# Altium PCB WRTnode2P_DB.PcbDoc (part 2 of 2)
Units mm, origin at the board's own origin, x right, y up, seen from the top; angles counter-clockwise.
Board outline 65.41 x 52.58 mm, 2 copper layers (Top Layer, Bottom Layer); 91 components, 81 nets, 456 pads, 154 vias.
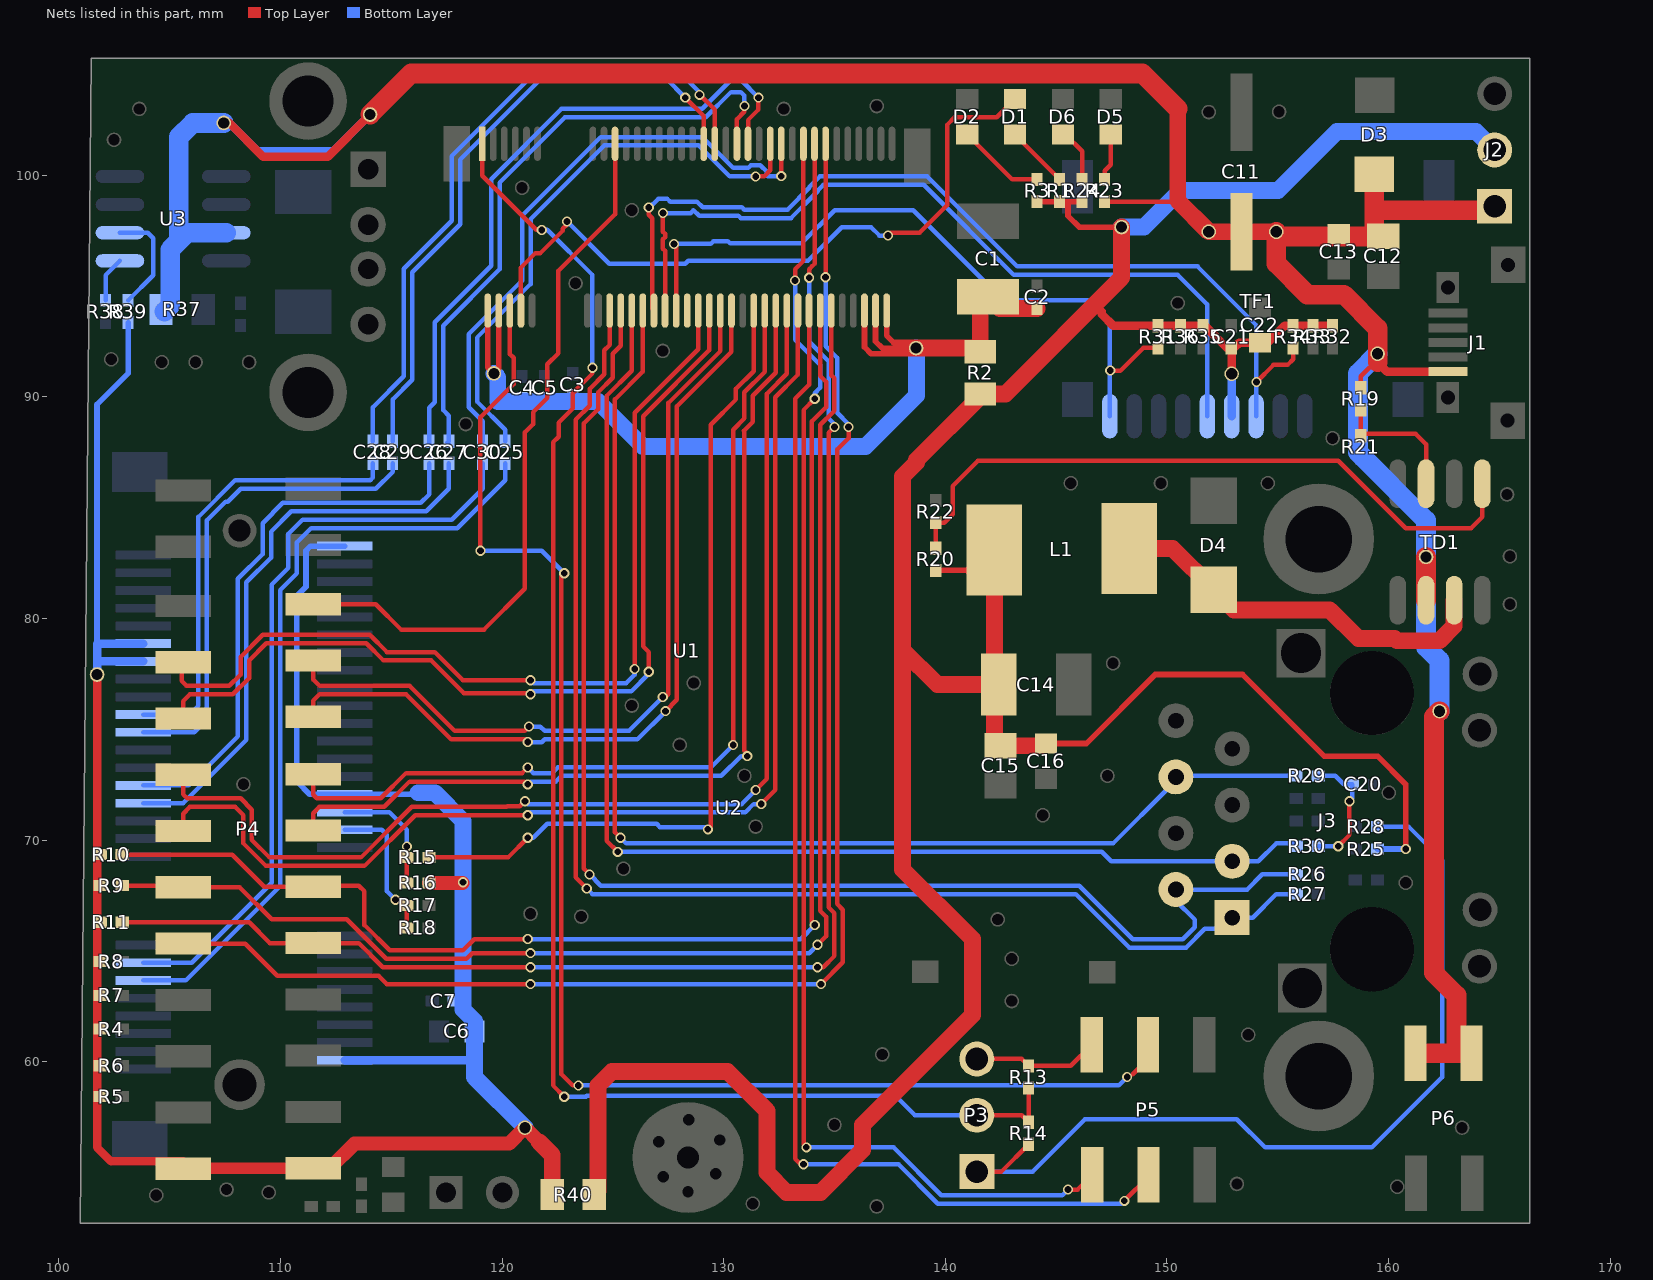
[diagram p2: the nets of this part, all layers, seen from the top]

## Via types
v1: diameter 0.457, hole 0.305, Top Layer to Bottom Layer, tented both sides, 151 vias
v2: diameter 1, hole 1, Top Layer to Bottom Layer, 2 vias
v3: diameter 0.457, hole 0.305, Top Layer to Bottom Layer, 1 vias

## Nets (pads, with @x,y where several pads share a name; then routed paths per layer and width w, separated by ;. In a path a pad name is that pad's centre, name@x,y a point inside that pad or via, vN(x,y) a via of type N, cw(c..) or ccw(c..) an arc to the next point about the centre after c; other vN are vias at no path point) (continued)
NetC20_2: C20.2 R29.1 R30.1 | length 5.7
  Top Layer w0.203: v1(157.734,69.723) 158.242,70.231 v1(158.242,71.755)
  Bottom Layer w0.203: R29.1@156.829,72.898 157.607,72.898 157.988,72.517 C20.2@158.369,72.517 158.369,71.882 v1(158.242,71.755) ; R30.1@156.837,69.723 v1(157.734,69.723)
NetC25_1: C25.1 U2.11 | length 35.1
  Bottom Layer w0.203: U2.11@103.806,63.665 105.732,63.665 109.982,67.914 109.982,81.28 110.744,82.042 110.744,83.439 111.379,84.074 117.983,84.074 120.142,86.233 C25.1@120.142,86.995
NetC26_1: C26.1 U2.25 | length 24.7
  Bottom Layer w0.203: U2.25@103.806,72.465 105.866,72.465 108.077,74.676 108.077,81.788 109.198,82.909 109.198,84.306 110.109,85.217 116.332,85.217 116.713,85.598 C26.1@116.713,87.003
NetC27_1: C27.1 U2.23 | length 25.7
  Bottom Layer w0.203: U2.23@103.806,71.665 105.604,71.665 108.458,74.518 108.458,81.63 109.579,82.751 109.579,83.925 110.49,84.836 116.586,84.836 117.602,85.852 C27.1@117.602,87.003
NetC28_1: C28.1 U2.33 | length 20.4
  Bottom Layer w0.203: U2.33@103.806,75.665 105.891,75.665 106.299,76.073 106.299,84.582 107.95,86.233 114.046,86.233 114.173,86.36 C28.1@114.173,87.003
NetC29_1: C29.1 U2.31 | length 21.8
  Bottom Layer w0.203: U2.31@103.806,74.865 106.107,74.865 106.68,75.438 106.68,84.424 107.521,85.265 107.617,85.265 108.204,85.852 114.3,85.852 115.062,86.614 C29.1@115.062,87.003
NetC30_1: C30.1 U2.13 | length 34.1
  Bottom Layer w0.203: U2.13@103.806,64.465 105.994,64.465 109.601,68.072 109.601,81.534 110.363,82.296 110.363,83.82 110.998,84.455 117.729,84.455 119.126,85.852 C30.1@119.126,86.995
NetD1_1: D1.1 R1.2 | length 2.9
  Top Layer w0.203: D1.1@143.154,101.841 143.154,101.821 R1.2@145.161,99.814
NetD2_1: D2.1 R3.2 | length 4
  Top Layer w0.203: D2.1@140.995,101.841 143.023,99.814 R3.2@144.145,99.814
NetD4_2: D4.2 L1.1 TD1.3 | length 17.8
  Top Layer w0.762: L1.1@148.311,83.16 150.264,83.16 D4.2@152.121,81.303 153.033,80.391 157.353,80.391 158.653,79.091 160.276,79.091 160.373,78.994 162.306,78.994 162.966,79.654 TD1.3@162.966,80.823
NetD5_1: D5.1 R23.2 | length 2.1
  Top Layer w0.203: R23.2@147.193,99.814 147.193,100.203 147.472,100.482 D5.1@147.472,101.841
NetD6_1: D6.1 R24.2 | length 2.5
  Top Layer w0.203: D6.1@145.313,101.841 145.428,101.841 146.177,101.092 R24.2@146.177,99.814
NetP3_2: P3.2 R13.2 R14.1 U1.1 | length 69.3
  Top Layer w0.203: U1.1@119.101,101.422 119.101,99.974 121.539,97.536 v1(121.793,97.536) ; v1(122.809,58.42) 122.301,58.928 122.301,87.949 122.555,88.203 122.555,88.842 123.19,89.477 123.19,90.17 124.079,91.059 v1(124.079,91.313) ; P3.2@141.427,57.582 143.451,57.582 R14.1@143.764,57.269 R13.2@143.764,58.809
  Bottom Layer w0.203: v1(121.793,97.536) 122.047,97.536 124.079,95.504 v1(124.079,91.313) ; v1(122.809,58.42) 123.789,58.42 123.825,58.456 137.759,58.456 138.633,57.582 P3.2@141.427,57.582
NetR15_2: R15.2 R16.2 U2.22 | length 5.5
  Top Layer w0.203: R16.2@115.705,68.072 R15.2@115.705,69.215 v1(115.705,69.715)
  Bottom Layer w0.203: U2.22@112.906,71.265 114.917,71.265 115.705,70.477 v1(115.705,69.715)
NetR17_2: R17.2 R18.1 U2.20 | length 6.7
  Top Layer w0.203: v1(115.189,67.31) 115.451,67.31 R17.2@115.705,67.056 R18.1@115.705,66.04
  Bottom Layer w0.203: U2.20@112.906,70.465 114.574,70.465 114.808,70.231 114.808,67.691 v1(115.189,67.31)
NetR19_1: R19.1 R21.1 TD1.7 | length 6.1
  Top Layer w0.203: R21.1@158.75,88.249 158.75,88.829 R19.1@158.75,89.408 ; R21.1@158.75,88.329 161.226,88.329 161.696,87.859 TD1.7@161.696,86.081
NetR20_2: R20.2 R22.2 TD1.5 | length 30.3
  Top Layer w0.203: R20.2@139.573,83.169 R22.2@139.573,84.328 139.954,84.328 140.335,84.709 140.335,85.979 141.478,87.122 157.734,87.122 160.782,84.074 163.728,84.074 164.236,84.582 TD1.5@164.236,85.7
PCIE_CKN: C25.2 U1.53 | length 25.6
  Top Layer w0.203: v1(131.445,99.949) 131.826,99.949 132.101,100.224 U1.53@132.101,101.422
  Bottom Layer w0.203: C25.2@120.142,87.995 120.142,88.519 118.872,89.789 118.872,92.679 121.285,95.092 121.285,98.013 124.618,101.346 128.874,101.346 130.271,99.949 v1(131.445,99.949)
PCIE_CKP: C30.2 U1.55 | length 27
  Top Layer w0.203: v1(132.601,99.962) U1.55@132.601,101.422
  Bottom Layer w0.203: C30.2@119.126,87.995 119.126,88.9 118.491,89.535 118.491,92.837 120.904,95.25 120.904,98.171 124.46,101.727 129.032,101.727 130.429,100.33 131.108,100.33 131.235,100.457 131.655,100.457 131.953,100.159 131.953,99.98 131.984,99.949 131.996,99.962 v1(132.601,99.962)
PCIE_RXN: C27.2 U1.47 | length 28
  Top Layer w0.203: U1.47@130.601,101.422 130.601,102.534 130.937,102.87 v1(130.937,103.124)
  Bottom Layer w0.203: C27.2@117.538,87.94 C27.2@117.602,87.876 ; C27.2@117.602,88.003 117.602,89.154 117.348,89.408 117.348,93.218 119.888,95.758 119.888,99.664 122.84,102.616 129.19,102.616 130.333,103.759 130.779,103.759 130.937,103.601 v1(130.937,103.124)
PCIE_RXP: C26.2 U1.49 | length 29.6
  Top Layer w0.203: U1.49@131.101,101.422 131.101,102.495 131.572,102.966 v1(131.572,103.505)
  Bottom Layer w0.203: C26.2@116.713,87.876 C26.2@116.713,88.003 116.713,89.504 116.967,89.758 116.967,93.376 119.507,95.916 119.507,99.822 122.682,102.997 129.032,102.997 130.302,104.267 130.81,104.267 v1(131.572,103.505)
PCIE_TXN: C29.2 U1.41 | length 28.5
  Top Layer w0.203: v1(128.27,103.505) 129.101,102.674 U1.41@129.101,101.422
  Bottom Layer w0.203: C29.2@115.062,88.003 115.062,89.885 115.951,90.774 115.951,95.631 118.11,97.79 118.11,100.711 121.793,104.394 127.381,104.394 v1(128.27,103.505)
PCIE_TXP: C28.2 U1.43 | length 30.2
  Top Layer w0.203: v1(128.905,103.632) 128.905,103.663 129.601,102.967 U1.43@129.601,101.422
  Bottom Layer w0.203: C28.2@114.173,88.003 114.173,88.55 114.173,89.535 115.57,90.932 115.57,95.789 117.729,97.948 117.729,100.869 121.635,104.775 127.889,104.775 128.905,103.759 v1(128.905,103.632)
PERSTN: R15.1 U1.50 | length 37.6
  Top Layer w0.203: R15.1@116.705,69.215 120.269,69.215 v1(121.158,70.104) ; v1(129.286,70.485) 129.413,70.612 129.413,88.742 130.556,89.885 130.556,90.364 131.355,91.163 U1.50@131.355,93.898
  Bottom Layer w0.203: v1(121.158,70.104) 121.412,70.104 122.047,70.739 126.975,70.739 127.127,70.587 129.184,70.587 v1(129.286,70.485)
REF_CLK0: P4.21 U1.25 | length 32.6
  Top Layer w0.203: P4.21@111.476,80.645 114.3,80.645 115.443,79.502 119.188,79.502 121.031,81.345 121.031,88.396 121.412,88.777 121.412,89.316 122.047,89.951 122.047,91.471 122.546,91.97 122.546,95.687 125.101,98.242 U1.25@125.101,101.422
RXIN0: J3.2 R26.1 U1.26 | length 62.2
  Top Layer w0.203: v1(123.952,68.453) 123.698,68.707 123.698,88.808 124.333,89.443 124.333,90.201 124.998,90.865 124.998,91.947 125.355,92.304 U1.26@125.355,93.898
  Bottom Layer w0.203: v1(123.952,68.453) 124.46,67.945 146.05,67.945 148.463,65.532 150.718,65.532 151.257,66.071 151.257,66.414 J3.2@150.409,67.262 ; J3.2@150.409,67.77 153.622,67.77 154.305,68.453 R26.1@155.837,68.453
RXIN1: P4.15 U1.52 | length 41.4
  Top Layer w0.203: P4.15@111.476,72.974 111.476,72.039 111.633,71.882 114.523,71.882 115.666,73.025 120.904,73.025 v1(121.158,73.279) ; v1(130.429,74.295) 130.429,88.519 130.937,89.027 130.937,90.206 131.855,91.124 U1.52@131.855,93.898
  Bottom Layer w0.203: v1(121.158,73.279) 121.412,73.025 122.27,73.025 122.524,73.279 129.413,73.279 v1(130.429,74.295)
RXIN2: P4.19 U1.44 | length 37
  Top Layer w0.203: P4.19@111.476,78.105 111.476,77.246 111.76,76.962 115.824,76.962 117.856,74.93 121.031,74.93 v1(121.221,75.12) ; v1(127.254,76.454) 127.381,76.454 127.508,76.581 127.508,89.727 129.855,92.074 U1.44@129.855,93.898
  Bottom Layer w0.203: v1(121.221,75.12) 121.73,75.12 121.92,74.93 125.73,74.93 v1(127.254,76.454)
RXIN4: R34.2 TF1.3 U1.32 | length 42.6
  Top Layer w0.203: v1(126.619,98.552) 126.619,98.223 126.784,98.058 126.784,93.968 U1.32@126.855,93.898 ; v1(154.051,90.678) 154.813,91.44 155.448,91.44 155.702,91.694 R34.2@155.702,92.21
  Bottom Layer w0.203: v1(126.619,98.552) 126.663,98.552 127.044,98.933 127.464,98.933 127.591,98.806 128.796,98.806 129.05,98.552 130.828,98.552 130.929,98.45 132.885,98.45 133.871,99.436 133.871,99.471 134.348,99.949 139.192,99.949 143.256,95.885 151.384,95.885 154.026,93.243 TF1.3@154.026,89.129
RXIP0: J3.1 R27.1 U1.24 | length 60.8
  Top Layer w0.203: v1(123.825,67.818) 123.317,68.326 123.317,88.965 123.952,89.6 123.952,90.359 124.617,91.023 124.617,92.105 124.855,92.343 U1.24@124.855,93.898
  Bottom Layer w0.203: v1(123.825,67.818) 124.079,67.564 145.892,67.564 148.305,65.151 150.876,65.151 151.717,65.992 J3.1@152.949,65.992 ; J3.1@152.949,66.5 153.876,66.5 154.94,67.564 R27.1@155.837,67.564
RXIP1: P4.13 U1.54 | length 42.3
  Top Layer w0.203: P4.13@111.476,70.434 111.476,71.217 111.76,71.501 114.681,71.501 115.824,72.644 121.031,72.644 v1(121.158,72.517) ; v1(131.064,73.787) 131.064,73.914 130.937,74.041 130.937,88.437 130.912,88.463 131.318,88.869 131.318,90.049 132.355,91.085 U1.54@132.355,93.898
  Bottom Layer w0.203: v1(121.158,72.517) 121.285,72.644 122.428,72.644 122.682,72.898 129.896,72.898 130.785,73.787 v1(131.064,73.787)
RXIP2: P4.17 U1.46 | length 37.7
  Top Layer w0.203: P4.17@111.476,75.514 111.476,76.297 111.76,76.581 115.666,76.581 117.698,74.549 121.031,74.549 v1(121.158,74.422) v1@121.285,74.422 ; v1(127.381,75.819) 127.889,76.327 127.889,89.57 130.355,92.035 U1.46@130.355,93.898
  Bottom Layer w0.203: v1(121.158,74.422) 121.793,74.422 121.92,74.549 126.111,74.549 v1(127.381,75.819)
RXIP4: TF1.5 U1.34 | length 37.2
  Top Layer w0.203: v1(127.262,98.298) 127.262,97.461 127.254,97.453 127.355,97.352 127.355,97.212 127.254,97.111 127.254,96.691 127.355,96.59 U1.34@127.355,93.898
  Bottom Layer w0.203: v1(127.262,98.298) 128.511,98.298 128.638,98.425 128.892,98.171 130.67,98.171 130.772,98.069 133.043,98.069 134.252,99.278 134.252,99.314 134.506,99.568 139.034,99.568 143.098,95.504 150.495,95.504 151.826,94.173 TF1.5@151.826,89.129
SPI_CLK: P4.10 U1.63 | length 68.6
  Top Layer w0.203: P4.10@105.613,65.329 108.407,65.329 109.855,63.881 114.427,63.881 114.808,63.5 v1(121.285,63.5) ; v1(134.397,63.5) 135.382,64.485 135.382,66.864 135.128,67.118 135.128,87.63 135.636,88.138 v1(135.636,88.646) ; v1(134.601,95.396) U1.63@134.601,101.422
  Bottom Layer w0.203: v1(121.285,63.5) v1(134.397,63.5) ; v1(134.601,95.396) 134.601,92.283 135.128,91.756 135.128,89.281 135.636,88.773 v1(135.636,88.646)
SPI_CS1: P4.12 R9.1 U1.64 | length 62.1
  Top Layer w0.203: R9.1@102.862,67.945 P4.12@105.537,67.945 ; P4.12@105.613,67.869 108.153,67.869 109.601,66.421 112.999,66.421 114.777,64.643 118.395,64.643 118.649,64.897 v1(121.285,64.897) ; v1(134.239,65.278) 134.62,65.659 134.62,66.548 134.366,66.802 134.366,88.742 135.001,89.377 135.001,90.836 134.855,90.982 U1.64@134.855,93.898
  Bottom Layer w0.203: v1(121.285,64.897) 133.858,64.897 v1(134.239,65.278)
SPI_MISO: P4.11 R10.1 U1.62 | length 62.5
  Top Layer w0.203: R10.1@102.862,69.342 107.823,69.342 109.271,67.894 P4.11@111.476,67.894 ; P4.11@111.527,67.945 113.538,67.945 113.792,67.691 113.792,66.167 114.935,65.024 118.237,65.024 118.745,65.532 v1(121.158,65.532) ; v1(134.112,66.167) 133.985,66.294 133.985,88.9 134.62,89.535 134.62,90.678 134.355,90.943 U1.62@134.355,93.898
  Bottom Layer w0.203: v1(121.158,65.532) 133.477,65.532 v1(134.112,66.167)
SPI_MOSI: P4.9 R11.1 U1.61 | length 70.6
  Top Layer w0.203: R11.1@102.862,66.294 108.585,66.294 109.525,65.354 P4.9@111.476,65.354 113.527,65.354 114.619,64.262 v1(121.285,64.262) ; v1(133.858,95.377) 133.858,95.758 133.985,95.885 134.101,96.001 U1.61@134.101,101.422 ; v1(134.239,64.262) 134.493,64.262 135.001,64.77 135.001,66.706 134.747,66.96 134.747,88.392 v1(135.001,88.646)
  Bottom Layer w0.203: v1(121.285,64.262) v1(134.239,64.262) ; v1(133.858,95.377) 133.858,92.487 134.747,91.598 134.747,89.027 135.001,88.773 v1(135.001,88.646)
TF_INT: R31.2 TF1.9 U1.36 | length 32.4
  Top Layer w0.203: v1(127.762,96.901) 127.82,96.901 127.855,96.867 U1.36@127.855,93.898 ; v1(147.447,91.186) 147.908,91.186 148.932,92.21 R31.2@149.606,92.21
  Bottom Layer w0.203: v1(127.762,96.901) 129.413,96.901 129.54,97.028 130.197,97.028 130.298,96.926 133.517,96.926 135.015,98.425 138.561,98.425 142.625,94.361 146.431,94.361 147.426,93.366 TF1.9@147.426,89.129
TXON0: J3.6 R29.2 U1.30 | length 56
  Top Layer w0.203: v1(125.349,70.104) 125.095,70.358 125.095,89.885 126.355,91.145 U1.30@126.355,93.898
  Bottom Layer w0.203: v1(125.349,70.104) 125.603,69.85 147.574,69.85 150.066,72.342 J3.6@150.409,72.342 ; J3.6@150.457,72.898 R29.2@155.829,72.898
TXON1: P4.16 U1.56 | length 52.3
  Top Layer w0.203: P4.16@105.613,72.949 105.613,72.06 105.791,71.882 108.204,71.882 108.712,71.374 108.712,70.008 109.505,69.215 113.634,69.215 115.92,71.501 120.204,71.501 120.225,71.522 120.798,71.522 v1(121.031,71.755) ; v1(131.445,72.263) 131.953,72.771 131.953,90.145 132.855,91.046 U1.56@132.855,93.898
  Bottom Layer w0.203: v1(121.031,71.755) 121.158,71.628 130.81,71.628 v1(131.445,72.263)
TXON2: P4.20 U1.40 | length 41.5
  Top Layer w0.203: P4.20@105.613,78.029 105.537,77.953 105.537,77.185 105.76,76.962 107.696,76.962 108.204,77.47 108.204,78.263 109.207,79.265 114.029,79.265 114.808,78.486 116.967,78.486 118.237,77.216 v1(121.285,77.216) ; v1(125.984,77.724) 125.984,89.281 128.855,92.152 U1.40@128.855,93.898
  Bottom Layer w0.203: v1(121.285,77.216) 121.412,77.089 125.603,77.089 125.984,77.47 v1(125.984,77.724)
TXOP0: J3.3 R30.2 U1.28 | length 56.2
  Top Layer w0.203: v1(125.222,69.469) 124.714,69.977 124.714,90.043 125.855,91.184 U1.28@125.855,93.898
  Bottom Layer w0.203: v1(125.222,69.469) 147.066,69.469 147.495,69.04 J3.3@152.949,69.04 154.13,69.04 154.94,69.85 R30.2@155.837,69.85
TXOP1: P4.14 U1.58 | length 53
  Top Layer w0.203: P4.14@105.613,70.409 105.613,71.196 105.918,71.501 107.95,71.501 108.331,71.12 108.331,69.85 109.347,68.834 113.792,68.834 116.078,71.12 v1(121.158,71.12) ; v1(131.699,71.628) 132.334,72.263 132.334,89.987 133.355,91.008 U1.58@133.355,93.898
  Bottom Layer w0.203: v1(121.158,71.12) 121.285,71.247 130.968,71.247 131.349,71.628 v1(131.699,71.628)
TXOP2: P4.18 U1.42 | length 42.2
  Top Layer w0.203: P4.18@105.613,75.489 105.613,76.276 105.918,76.581 107.854,76.581 108.585,77.312 108.585,78.105 109.364,78.884 113.871,78.884 114.65,78.105 116.809,78.105 118.282,76.632 v1@121.082,76.632 ; v1(126.619,77.597) 126.619,78.486 126.365,78.74 126.365,89.123 129.355,92.113 U1.42@129.355,93.898
  Bottom Layer w0.203: v1(121.285,76.581) 121.412,76.708 125.824,76.708 126.619,77.503 v1(126.619,77.597)
TXOP3: U1.38
UART0_RX: P5.1 U1.59 | length 60.5
  Top Layer w0.203: v1(133.223,95.25) 133.223,95.758 133.601,96.136 U1.59@133.601,101.422 ; v1(133.731,56.134) 133.604,56.261 133.604,89.408 v1(134.112,89.916) ; v1(145.542,54.229) 145.969,54.229 P5.1@146.634,54.894
  Bottom Layer w0.203: v1(133.223,95.25) 133.223,92.583 134.366,91.44 134.366,90.424 134.112,90.17 v1(134.112,89.916) ; v1(133.731,56.134) 137.668,56.134 139.827,53.975 145.288,53.975 v1(145.542,54.229)
UART0_TX: P5.3 U1.60 | length 55.9
  Top Layer w0.203: v1(133.604,55.372) 133.477,55.372 133.223,55.626 133.223,89.916 133.855,90.548 U1.60@133.855,93.898 ; v1(148.082,53.721) 149.174,54.813 P5.3@149.174,54.894
  Bottom Layer w0.203: v1(133.604,55.372) 137.891,55.372 139.669,53.594 147.955,53.594 v1(148.082,53.721)
UART1_RX: P3.3 P5.2 R13.1 | length 5.7
  Top Layer w0.203: P3.3@141.427,60.122 143.451,60.122 143.756,59.817 145.669,59.817 P5.2@146.609,60.757
UART1_TX: P5.4 U1.6 | length 65.9
  Top Layer w0.203: v1(119.024,83.058) 119.024,89.083 120.523,90.582 120.523,91.765 120.355,91.934 U1.6@120.355,93.898 ; v1(122.809,82.042) 122.682,81.915 122.682,59.436 123.19,58.928 v1(123.444,58.928) ; 148.463,59.436 149.149,60.122 P5.4@149.149,60.757
  Bottom Layer w0.203: v1(119.024,83.058) 121.793,83.058 v1(122.809,82.042) ; v1(123.444,58.928) 147.828,58.928 v1(148.209,59.309)
USB_OVERCUR: R39.1 U3.2 | length 4.9
  Bottom Layer w0.203: U3.2@102.756,97.409 104.013,97.409 104.267,97.155 104.267,95.496 R39.1@103.124,94.353
USB_PWREN: R38.1 U3.1 | length 2.1
  Bottom Layer w0.203: R38.1@102.108,94.353 102.108,95.491 U3.1@102.756,96.139
V3.3: C6.2 C7.2 P4.1 P4.2 pad.5@121.031,57.023 pad.7 R4.2 R5.2 R6.2 R7.2 R8.2 R9.2 R10.2 R11.2 R16.1 R39.2 R40.1 U2.2 U2.24 U2.39 U2.41 U2.52 | length 109.6
  Top Layer w0.381: pad.7@101.725,77.472 101.725,56.136 102.362,55.499 P4.2@105.613,55.499
  Top Layer w0.508: P4.2@105.613,55.169 105.639,55.194 P4.1@111.476,55.194 P4.1@112.243,55.194
  Top Layer w0.635: P4.1@112.243,55.194 113.347,56.299 120.307,56.299 pad.5@121.031,57.023 121.666,56.388 ; R16.1@116.705,68.072 v3@118.212,68.072
  Top Layer w0.762: 121.666,56.388 122.265,55.789 R40.1@122.265,54
  Bottom Layer w0.254: 101.725,78.865 101.725,89.66 103.124,91.059 R39.2@103.124,93.353 ; U2.52@112.906,83.265 111.357,83.265 111.15,83.058 111.15,81.432 110.744,81.026 110.744,72.644 111.323,72.065 U2.24@112.906,72.065 116.896,72.065
  Bottom Layer w0.381: pad.7@101.725,77.472 101.725,78.865 U2.41@103.806,78.865 ; 101.814,78.065 U2.39@103.806,78.065 ; U2.2@112.906,60.065 118.485,60.065 118.758,60.338
  Bottom Layer w0.762: 116.205,72.136 116.967,72.136 118.237,70.866 v3(118.237,68.097) 118.237,62.349 118.758,61.828 C6.2@118.758,61.366 118.758,60.338 118.758,59.296 pad.5@121.031,57.023
V3.3V: C1.1 C2.2 C3.2 C4.2 C5.2 pad.1@119.634,91.059 pad.2@138.684,92.202 R2.2 U1.2 U1.4 U1.70 U1.72 U1.74 | length 53.3
  Top Layer w0.254: U1.2@119.355,93.898 119.355,91.338 pad.1@119.634,91.059 119.855,91.28 U1.4@119.855,93.898 ; U1.70@136.355,93.898 136.355,92.245 136.652,91.948 R2.2@141.493,91.948 ; U1.72@136.855,93.898 136.855,92.507 137.16,92.202 pad.2@138.684,92.202 141.412,92.202 R2.2@141.58,92.034 ; U1.74@137.355,93.898 137.355,92.769 137.668,92.456 R2.2@141.58,92.456
  Top Layer w0.762: R2.2@141.58,92.034 141.58,92.456 C1.1@141.58,94.171 ; C1.1@141.935,94.526 142.473,93.988 C2.2@144.145,93.988
  Bottom Layer w0.762: pad.1@119.634,91.059 119.806,90.887 119.806,89.789 123.19,89.789 124.333,89.789 126.365,87.757 136.398,87.757 138.709,90.068 138.709,92.177 pad.2@138.684,92.202
VCC2V: P3.1 R14.2 R28.2 | length 40
  Top Layer w0.203: P3.1@141.427,55.042 142.537,55.042 R14.2@143.764,56.269
  Bottom Layer w0.203: P3.1@141.427,55.042 143.942,55.042 146.304,57.404 153.162,57.404 154.432,56.134 159.258,56.134 162.433,59.309 162.433,69.088 160.909,70.612 R28.2@159.504,70.612
VCC3V3: C14.1 C15.2 C16.2 C21.1 C22.1 J2.2 L1.2 pad.0@152.926,91.041 pad.4@147.955,97.663 R1.1 R2.1 R3.1 R20.1 R24.1 R25.2 R31.1 R32.1 R33.1 R34.1 R35.1 R36.1 R40.2 TF1.4 | length 153.2
  Top Layer w0.254: R20.1@139.573,82.169 L1.2@141.3,82.169 ; R3.1@144.145,98.814 R1.1@145.161,98.814 145.542,98.814 ; C16.2@144.551,74.358 146.367,74.358 149.479,77.47 153.416,77.47 157.099,73.787 159.512,73.787 160.782,72.517 v1(160.782,69.596) ; R24.1@146.177,98.814 145.542,98.814 ; pad.4@147.955,97.663 146.05,97.663 145.542,98.171 145.542,98.814
  Top Layer w0.381: 147.066,93.853 147.066,93.726 147.582,93.21 R31.1@149.606,93.21 R36.1@150.622,93.21 R35.1@151.638,93.21 151.709,93.21 152.709,92.21 153.035,92.21 153.268,92.443 C22.1@154.203,92.443 154.546,92.443 155.313,93.21 R34.1@155.702,93.21 R33.1@156.591,93.21 R32.1@157.48,93.21 ; pad.0@152.926,91.041 C21.1@152.926,92.101
  Top Layer w0.762: R40.2@124.165,54 124.333,54.168 124.333,58.928 124.968,59.563 130.175,59.563 131.953,57.785 131.953,54.991 132.842,54.102 134.366,54.102 136.271,56.007 136.271,57.15 141.224,62.103 141.224,65.532 138.074,68.682 138.074,78.588 ; L1.2@141.3,82.169 L1.2@142.215,83.083 C14.1@142.215,77.013 ; R2.1@141.58,90.018 138.709,87.147 138.709,87.045 138.074,86.41 138.074,78.588 ; R2.1@141.58,90.134 142.712,90.134 147.955,95.377 pad.4@147.955,97.663 ; C14.1@142.409,77.013 C14.1@142.215,77.013 ; C16.2@144.551,74.358 144.448,74.255 C15.2@142.494,74.255 142.215,74.535 C14.1@142.215,77.013 ; 138.074,78.588 139.649,77.013 C14.1@142.215,77.013
  Bottom Layer w0.254: R25.2@159.504,69.596 v1(160.782,69.596)
  Bottom Layer w0.381: TF1.4@152.926,89.129 pad.0@152.926,91.041
  Bottom Layer w0.762: pad.4@147.955,97.663 148.971,97.663 150.622,99.314 155.01,99.314 157.677,101.981 163.957,101.981 J2.2@164.795,101.143
VCC5V: C11.1 C12.2 C13.2 D3.2 J1.1 J2.1 P6.2 P6.4 pad.0@107.442,102.362 pad.0@162.306,75.819 pad.2@154.94,97.452 pad.3@151.892,97.452 pad.4@114.046,102.743 pad.8 pad.9 R19.2 R23.1 R37.1 TD1.2 U3.7 | length 143.1
  Top Layer w0.203: R23.1@147.193,98.814 150.46,98.814 ; R19.2@158.75,90.408 158.75,90.932 159.131,91.313
  Top Layer w0.381: pad.0@107.442,102.362 107.696,102.362 109.22,100.838 112.141,100.838 pad.4@114.046,102.743 ; 159.512,91.567 159.944,91.135 J1.1@162.687,91.135
  Top Layer w0.762: 150.495,102.997 150.495,98.849 pad.3@151.892,97.452 C11.1@153.365,97.452 pad.2@154.94,97.452
  Top Layer w0.889: pad.4@114.046,102.743 115.9,104.597 148.895,104.597 150.495,102.997 ; pad.2@154.94,97.452 154.94,96.012 156.337,94.615 157.988,94.615 159.512,93.091 pad.9@159.512,91.948 159.512,91.567 ; pad.2@155.15,97.242 C12.2@159.766,97.242 ; C12.2@159.36,97.598 159.36,98.425 ; D3.2@159.36,100.051 159.36,98.425 ; P6.2@161.214,60.376 163.068,60.376 ; TD1.2@161.696,80.823 pad.8@161.696,82.779 ; pad.0@162.306,75.819 162.052,75.565 162.052,64.008 163.068,62.992 163.068,60.376 ; P6.4@163.754,60.376 163.068,60.376 ; J2.1@164.795,98.603 164.617,98.425 159.36,98.425
  Bottom Layer w0.381: pad.0@107.442,102.362 107.696,102.362 108.982,101.076 112.379,101.076 pad.4@114.046,102.743
  Bottom Layer w0.889: R37.1@104.764,93.853 105.029,94.118 105.029,96.647 105.41,97.028 ; pad.0@107.442,102.362 106.045,102.362 105.41,101.727 105.41,97.028 ; U3.7@107.556,97.409 105.791,97.409 105.41,97.028 ; pad.9@159.512,91.948 158.623,91.059 158.623,87.503 161.696,84.43 pad.8@161.696,82.779 161.696,78.715 162.306,78.105 pad.0@162.306,75.819
WLED: D1.2 U1.8 | length 31.5
  Top Layer w0.203: U1.8@120.855,93.898 120.855,95.836 121.491,96.472 121.714,96.472 122.73,97.488 122.73,97.584 122.936,97.79 v1(122.936,97.917) ; v1(137.414,97.282) 137.538,97.406 138.839,97.406 140.081,98.648 140.081,102.272 140.425,102.616 142.329,102.616 D1.2@143.154,103.441
  Bottom Layer w0.203: v1(122.936,97.917) 124.841,96.012 128.27,96.012 128.397,96.139 133.807,96.139 135.331,97.663 136.652,97.663 137.033,97.282 v1(137.414,97.282)
pads on no net: CON1.5 CON1.6 J1.2 J1.3 J1.4 J1.7 J1.8 J1.9 J3.0 J3.7 J3.9 J3.10 J3.11 J3.12 TD1.1 TD1.6 TD1.8 U1.0 U2.0 U2.1 U2.3 U2.5 U2.7 U2.8 U2.10 U2.12 U2.14 U2.16 U2.17 U2.19 U2.30 U2.32 U2.36 U2.38 U2.45 U2.46 U2.47 U2.49 U2.51 U2.53 U2.54 U2.55 U2.56 U3.4 U3.5
copper on no net:
  other v2: 149.096,99.883 157.076,99.883

## Polygon pours and split planes (outlines as drawn)
DGND on Top Layer "Top Layer-No Net" (solid, pour order 4): 101.917,104.584 101.536,104.203 101.536,53.53 102.171,52.895 108.902,52.895 165.925,52.895 166.306,53.276 166.306,53.404 166.306,104.838 165.925,105.219 102.679,105.219 101.536,104.076
DGND on Bottom Layer "Top Layer-No Net" (solid, pour order 3): 101.981,104.521 101.6,104.14 101.6,53.467 102.235,52.832 108.966,52.832 165.989,52.832 166.37,53.213 166.37,53.34 166.37,104.775 165.989,105.156 102.743,105.156 101.6,104.013

## Keep-outs
Keep-Out Layer:
  lines w0.127: 100.965,105.283 101.473,105.283 166.37,105.283 166.37,52.705 100.965,52.705 100.965,105.283 ; 100.965,105.283 100.965,105.283

## Other copper
Top Layer:
  pour cut-out: 112.776,94.869 116.459,94.869 116.586,94.742 116.84,94.996 116.84,99.98 118.11,101.25 119.03,100.33 122.047,100.33 122.809,101.092 122.682,101.219 122.682,104.267 122.047,104.902 114.935,104.902 111.887,101.854 112.268,101.473 112.268,98.933 112.776,98.425

## Silkscreen, mask and mechanical layers (free items; w line width, h text height)
Top Overlay:
  lines w0.127: 108.585,85.471 108.966,85.09 ; 109.347,85.471 108.966,85.09 ; 121.094,86.296 120.396,86.995 110.236,86.995 108.966,85.725 108.966,85.09 ; 125.476,53.34 125.222,53.594 ; 125.476,53.848 125.222,53.594 ; 131.953,53.213 131.699,52.959 126.365,52.959 125.73,53.594 125.222,53.594
  text "G" at 161.671,103.632 h1.02
  text "3.3" at 160.655,101.219 h1.02
  text "V" at 161.671,99.822 h1.02
  text "5V" at 161.29,97.917 h1.02
  text "GND" at 121.539,85.471 h1.02
  text "GND" at 130.302,85.344 h1.02
  text "LINK4" at 121.539,82.677 h1.02
  text "LINK2" at 130.429,82.677 h1.02
  text "GPIO0" at 121.539,79.756 h1.02
  text "REF_CLK0" at 130.429,79.756 h1.02
  text "TXON2" at 121.539,77.597 h1.02
  text "RXIN2" at 130.429,77.597 h1.02
  text "TXOP2" at 121.539,74.803 h1.02
  text "RXIP2" at 130.429,74.803 h1.02
  text "TXON1" at 121.539,72.517 h1.02
  text "RXIN1" at 130.556,72.517 h1.02
  text "TXOP1" at 121.539,70.231 h1.02
  text "RXIP1" at 130.556,70.104 h1.02
  text "SPI_CS1" at 121.666,67.945 h1.02
  text "SPI_MISO" at 130.429,67.945 h1.02
  text "SPI_CLK" at 121.666,65.405 h1.02
  text "SPI_MOSI" at 130.556,65.405 h1.02
  text "I2C_SDA" at 121.666,62.738 h1.02
  text "I2C_SCK" at 130.683,62.738 h1.02
  text "I2S_CLK" at 121.793,60.452 h1.02
  text "I2S_WS" at 130.81,60.452 h1.02
  text "RX1" at 148.336,60.198 h1.02 r90
  text "TX1" at 151.003,60.198 h1.02 r90
  text "GND" at 153.416,60.071 h1.02 r90
  text "5V" at 165.735,59.944 h1.02 r90
  text "5V" at 162.941,59.817 h1.02 r90
  text "I2S_SDI" at 121.92,57.912 h1.02
  text "I2S_SDO" at 130.683,57.912 h1.02
  text "3.3V" at 121.92,55.88 h1.02
  text "3.3V" at 131.191,55.88 h1.02
  text "G" at 162.941,53.975 h1.02 r90
  text "G" at 165.608,53.975 h1.02 r90
  text "RX0" at 154.559,53.213 h1.02 r90
  text "TX0" at 155.956,53.213 h1.02 r90
  text "GND" at 157.48,53.213 h1.02 r90
Bottom Overlay:
  text "WRTnode2P_DB_V1.2" at 141.351,66.167 h1.02

## Text inside footprints (layer, text, board x,y; h text height)
U2: Bottom Overlay "1" at 104.225,58.565 h1.52 r90